# Altium PCB driver_V1.PcbDoc
Units mm, origin at the board's own origin, x right, y up, seen from the top; angles counter-clockwise.
Board outline 85.2 x 50.2 mm, 2 copper layers (Top Layer, Bottom Layer), stack 1.58 mm thick; 43 components, 21 nets, 112 pads, 20 vias.
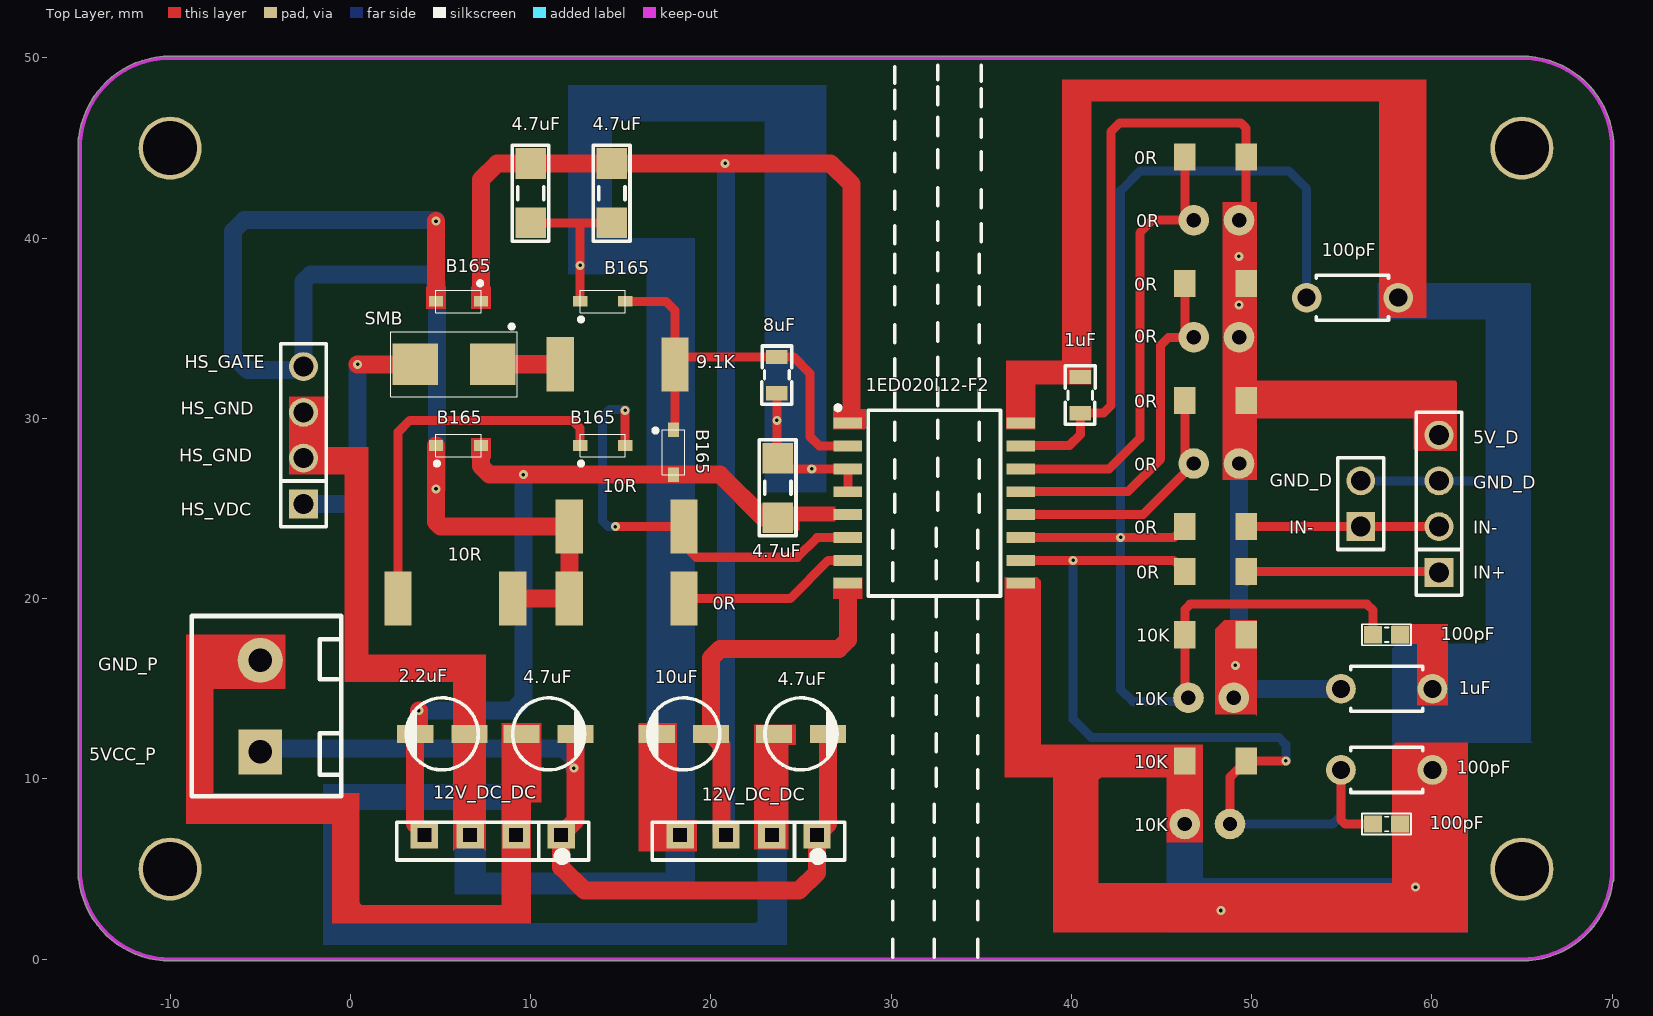
[diagram p0: Top Layer view]
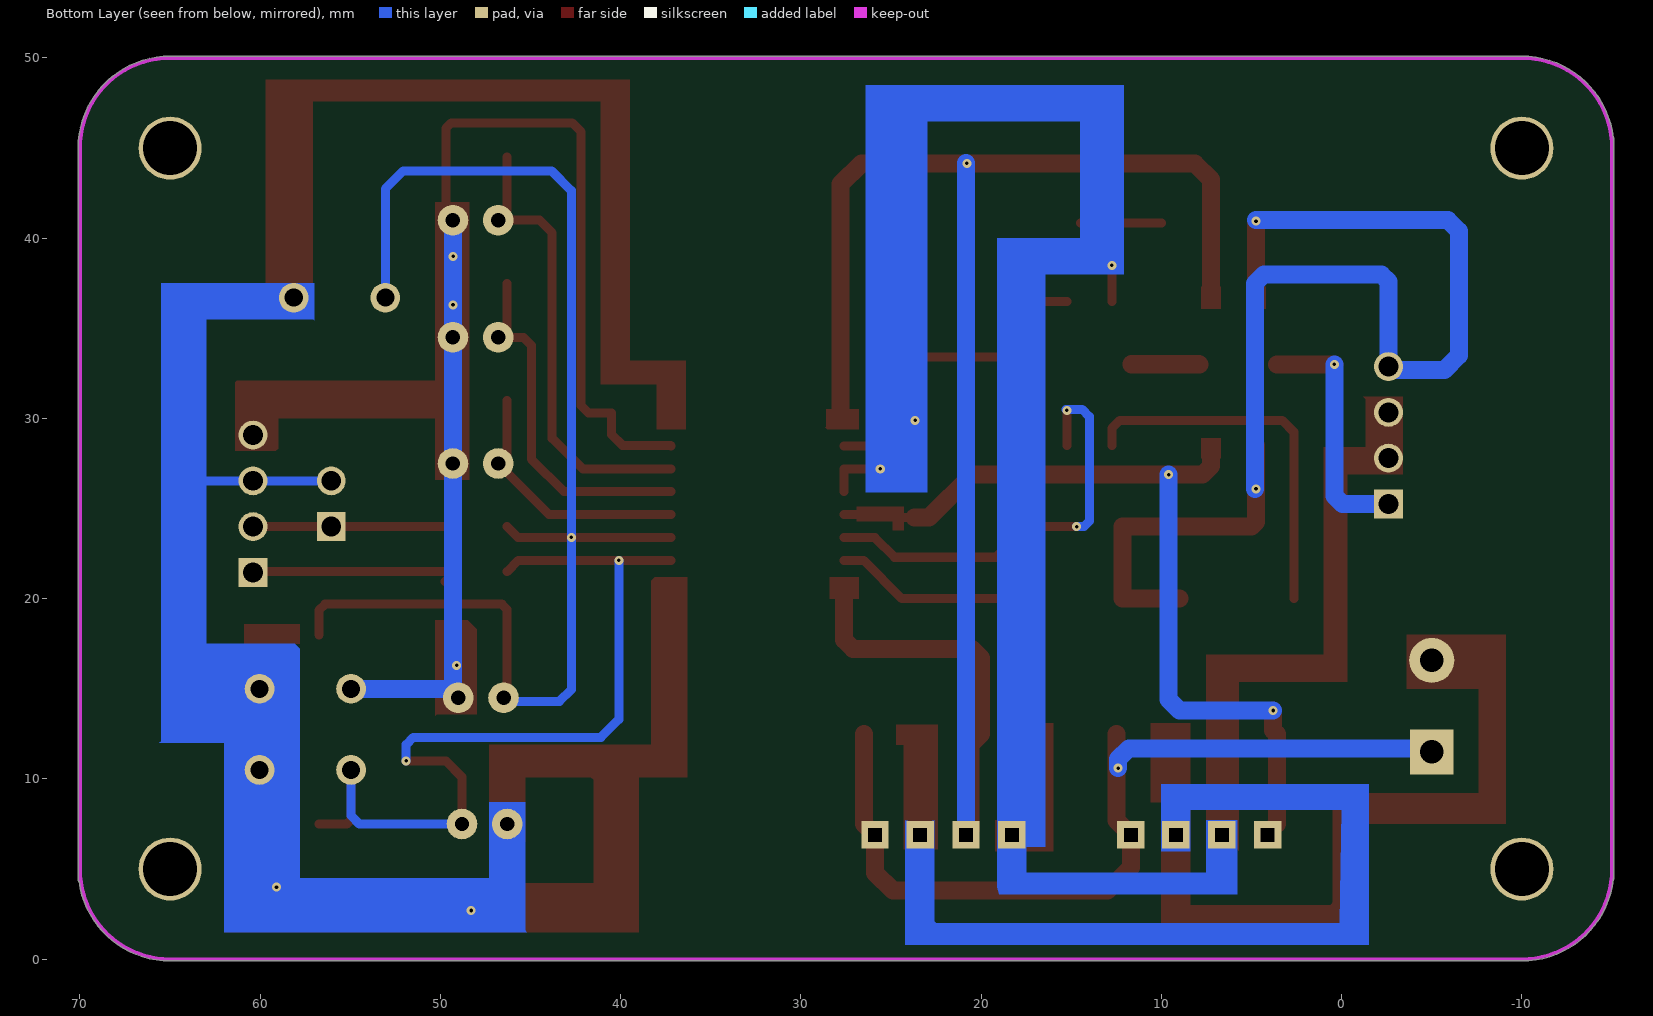
[diagram p1: Bottom Layer view, seen from below]
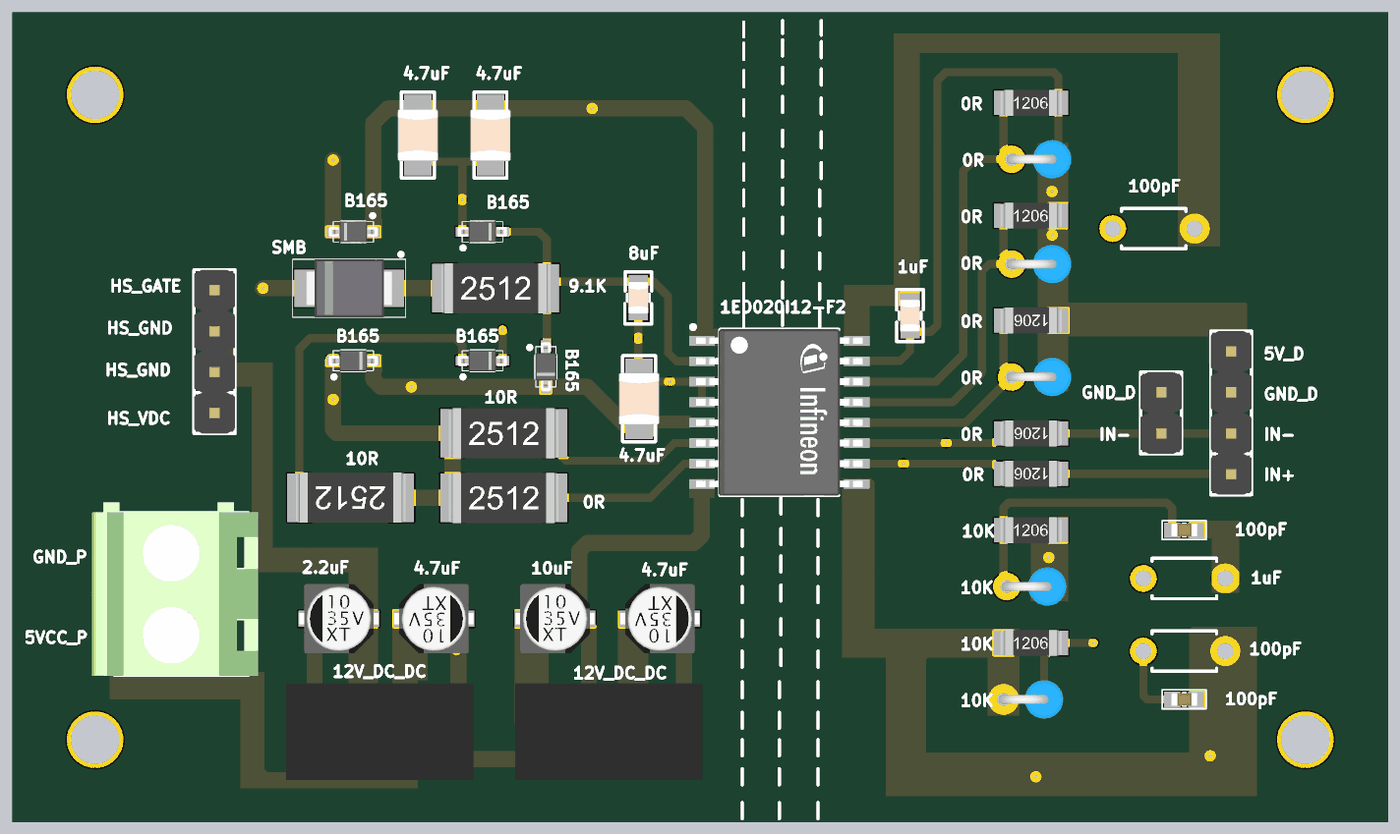
[diagram p2: 3D render of the assembled board from above, using the file's embedded part models]

## Layer stack, top to bottom
Top Solder: solder mask 0.01, Solder Resist, Dk 3.5
Top Layer: signal copper 0.035
Dielectric 1: dielectric 1.51, FR-4, Dk 4.8
Bottom Layer: signal copper 0.035
Bottom Solder: solder mask 0.01, Solder Resist, Dk 3.5

## Board outline
-15.1,44.999 cw(c-15,45) -15.1,45 cw(c-10,45) -15.1,45.005 -15.1,4.5 ccw(c-15,4.5) -15.068,4.426 ccw(c-10,5) -10,-0.1 65,-0.1 ccw(c65,5) 70.054,4.316 ccw(c70,4.4) 70.1,4.4 70.1,45 ccw(c65,45) 65,50.1 -10,50.1 ccw(c-10,45) -15.068,45.574 ccw(c-15,45.5)

## Design rules (kind name [scope] priority, off if disabled: settings)
Clearance [All] p1: gap=0.5 ignorepadtopadclearanceinfootprint=FALSE except(0: Arc-Hole Track-Hole SMDPad-Hole THPad-Hole Via-Hole Fill-Hole Poly-Hole Region-Hole Text-Hole)
PolygonConnect [All] p1: connectstyle=Relief reliefconductorwidth=0.254 reliefentries=4 polygonreliefangle="90 Angle" airgapwidth=0.254
RoutingVias [All] p1: holewidth=0.711 width=1.27 viastyle="Through Hole" minholewidth=0.711 minwidth=1.27 maxholewidth=0.711 maxwidth=1.27
SolderMaskExpansion [All] p1: expansion=0.102 istentingtop=FALSE
Width [All] p1: maxlimit=2 minlimit=0.5 preferedwidth=1
30 further rules are at their usual default settings.

## Classes and differential pairs
component class driver: 1ED020I12-F2 5V 5v C2 C6 C10 C11 C12 C13 D7 HS_GAte IN+ R4 R5 R6 R7 R8 R10 R12 R13 R14 R15 R16 R17 R19 U4

## Components (designator, comment, footprint, x,y, rotation, side; value= is the part's Value field where it differs from the comment)
0R "0R" RES1206 48,24 r180 top (schematic designator R12)
0R "0R" RES1206 48,21.5 r180 top (schematic designator R10)
0R "0R" RES1206 48,37.5 r0 top (schematic designator R8)
0R "0R" RES1206 48,31 r180 top (schematic designator R7)
0R "0R" RES1206 48,44.5 r0 top (schematic designator R6)
0R "0R" RES_Dung 48.5,34.5 r0 top (schematic designator R5)
0R "0R" RES_Dung 48.5,27.5 r0 top (schematic designator R2)
0R "0R" RES_Dung 48.5,41 r0 top (schematic designator R1)
0R "0R" RES_2512 15.315,19.8 r0 top (schematic designator R11)
1ED020I12-F2 "1ED020I12-F2" SOIC127P1028X264-16N-1 32.4,25.3 r0 top (schematic designator U3)
1uF "" CAPR5.08-4x2.5 57.5,15 r180 top (schematic designator C6)
1uF "1uF" "Tu 0805_N" 40.5,31.3 r270 top (schematic designator C5)
2.2uF "2.2uF_35V" tu_4x5.4mm 5.1,12.5 r0 top (schematic designator C2)
4.7uF "4.7uF" "tu 1206_N" 10,42.5 r270 top (schematic designator C14)
4.7uF "4.7uF" "tu 1206_N" 14.5,42.5 r270 top (schematic designator C13)
4.7uF "4.7uF" "tu 1206_N" 23.71,26.15 r270 top (schematic designator C7)
4.7uF "4.7uF_35V" tu_4x5.4mm 11,12.5 r180 top (schematic designator C4)
4.7uF "4.7uF_35V" tu_4x5.4mm 25,12.5 r180 top (schematic designator C1)
8uF "33pF" "Tu 0805_N" 23.66,32.41 r90 top (schematic designator C8)
9.1K "9.1K" RES_2512 14.815,32.8 r0 top (schematic designator R9)
10K "10K" RES_Dung 48,7.5 r0 top (schematic designator R16)
10K "10K" RES1206 48,11 r0 top (schematic designator R15)
10K "10K" RES1206 48,18 r0 top (schematic designator R4)
10K "10K" RES_Dung 48.2,14.5 r0 top (schematic designator R3)
10R "10R" RES_2512 15.315,23.8 r0 top (schematic designator R14)
10R "10R" RES_2512 5.834,20.208 r180 top (schematic designator R13)
10uF "10uF_35V" tu_4x5.4mm 18.5,12.5 r0 top (schematic designator C3)
12V_DC_DC "DC_DC_12V" B0512S/D-1W 22.04,6.6 r0 top (schematic designator U2)
12V_DC_DC "DC_DC_12V" B0512S/D-1W 7.85,6.6 r0 top (schematic designator U1)
100pF "" CAPR5.08-4x2.5 57.5,10.5 r180 top (schematic designator C11)
100pF "" CAPR5.08-4x2.5 55.6,36.7 r180 top (schematic designator C10)
100pF "100pF" "Tu 0603" 57.5,7.5 r180 top (schematic designator C12)
100pF "100pF" "Tu 0603" 57.5,18 r180 top (schematic designator C9)
B165 "BAT165" BAT165E6327HTSA1TRND 14,36.5 r90 top (schematic designator D6)
B165 "BAT165" BAT165E6327HTSA1TRND 6,36.5 r270 top (schematic designator D5)
B165 "BAT165" BAT165E6327HTSA1TRND 14,28.5 r90 top (schematic designator D4)
B165 "BAT165" BAT165E6327HTSA1TRND 6,28.5 r90 top (schematic designator D2)
B165 "BAT165" BAT165E6327HTSA1TRND 17.93,28.13 r0 top (schematic designator D1)
HS_GATE "JP 1x4 2.54" "JP 1X4 DT_N" -2.6,25.26 r90 top (schematic designator JP1)
IN+ "JP 1x4 2.54" "JP 1X4 DT_N" 60.4,21.46 r90 top (schematic designator JP2)
J1 "domino" domino_2pin_5.08mm -5,14.04 r90 top
JP3 "JP 1x2 2.54" "JP 1x2 DT_n" 56.06,24 r90 top
SMB "S3N" SMB 5.75,33 r180 top (schematic designator D3)

## Footprints (in the part's own frame and the unit in brackets; to place one, negate y for a bottom-side part, rotate by r counter-clockwise, add the part's x,y. Pads: shape width x height; smd on the part's side, far side on the other; paste and mask are expansions set on the pad)
B0512S/D-1W [mm] "B0512S/D-1W"
  rect 1.52x1.52 hole 0.75 square: 1(3.85,0.3) 2(1.35,0.3) 3(-1.2,0.3) 4(-3.74,0.3)
  silkscreen extent -5.28,-1.12 5.38,1, body extent -6,-4.1 5.6,1.91, height 18
BAT165E6327HTSA1TRND [mm] "BAT165E6327HTSA1TRND"
  rect 0.6x0.8 smd: 1(0,1.25) 2(0,-1.25)
  silkscreen extent -1.1,-1.25 0.63,1.3, body extent -0.71,-1.52 0.71,1.52, height 1.14
CAPR5.08-4x2.5 [mm] "Capacitor, Ceramic, Thru-Hole, Dipped Radial; Body 4 x 2.5 mm (WxT) Pin Spacing 5.08 mm (typ)"
  round 1.65 hole 1: 1(-2.54,0) 2(2.54,0)
  silkscreen extent -2,-1.25 2,1.25
domino_2pin_5.08mm [mm]
  rect 2.5x2.4 hole 1.3: 1(-2.54,0)
  round 2.5 hole 1.3: 2(2.54,0)
  silkscreen extent -5,-4.5 5,3.8, body extent -5.08,-5.1 5.68,5.2, height 13.59
"JP 1x2 DT_n" [mm] "2 pins, 1 row, straight, gold plating"
  rect 1.6x1.6 hole 1.1: 1(0,0)
  round 1.6 hole 1.1: 2(2.54,0)
  silkscreen extent -1.27,-1.27 3.81,1.27, body extent -1.27,-1.27 3.81,1.27, height 8.54
"JP 1X4 DT_N" [mm] "4 pins, 1 row, straight, gold plating"
  rect 1.6x1.6 hole 1.1: 1(0,0)
  round 1.6 hole 1.1: 2(2.54,0) 3(5.08,0) 4(7.62,0)
  silkscreen extent -1.27,-1.27 8.89,1.27, body extent -1.27,-1.27 8.89,1.27, height 8.54
RES1206 [mm]
  rect 1.2x1.5 smd: 1(-1.7,0) 2(1.7,0)
  body extent -1.9,-0.8 1.9,0.8, height 0.6
RES_2512 [mm]
  rect 1.5x3 smd: 1(3.185,0.2)
  rect 1.524x3 smd: 2(-3.166,0.208)
  body extent -3.4,-1.35 3.4,1.75, height 0.6
RES_Dung [mm] "Resistor, Axial; Body 10.0 x 2.8 mm (LxDia. max), Lead Dia. 0.7 mm (max)"
  round 1.7 hole 0.8: 1(-1.7,0) 2(0.807,0)
  body extent -2.01,-1.2 2.01,1.2, height 1.96
SMB [mm] "DO-214"
  rect 2.5x2.3 smd: 1(-2.15,0) 2(2.15,0)
  silkscreen extent -3.5,-2.2 3.5,1.8, body extent -2.7,-1.8 2.7,1.8
SOIC127P1028X264-16N-1 [mm] "SOIC,1.27mm,pitch;16 pin,7.52mm W X 10.34mm L X 2.64mm H body"
  rect 1.6x0.6 smd paste+0 mask+0: 1(-4.8,4.445) 2(-4.8,3.175) 3(-4.8,1.905) 4(-4.8,0.635) 5(-4.8,-0.635) 6(-4.8,-1.905) 7(-4.8,-3.175) 8(-4.8,-4.445) 9(4.8,-4.445) 10(4.8,-3.175) 11(4.8,-1.905) 12(4.8,-0.635) 13(4.8,0.635) 14(4.8,1.905) 15(4.8,3.175) 16(4.8,4.445)
  silkscreen extent -5.47,-5.15 3.68,5.42, body extent -5.16,-5.17 5.16,5.17, height 2.65
"Tu 0603" [mm] "Chip Capacitor, 2-Leads, Body 1,60x0,80mm, IPC Medium Density"
  rect 1x0.95 smd mask+0.076: 1(-0.75,0) 2(0.75,0)
  silkscreen extent -1.35,-0.58 1.37,0.58, body extent -0.8,-0.4 0.8,0.4, height 0.9
"Tu 0805_N" [mm] "Compoment SMD 80x50mil"
  rect 0.8x1.2 smd: 1(-1,-0.003) 2(1,0)
  silkscreen extent -1.62,-0.83 1.61,0.83, body extent -1,-0.62 1,0.63, height 1.26
"tu 1206_N" [mm]
  rect 1.7x1.7 smd: 1(-1.65,0) 2(1.65,0)
  silkscreen extent -2.67,-1.02 2.67,1.02, body extent -1.6,-1.25 1.6,1.25, height 2.01
tu_4x5.4mm [mm]
  rect 2x1 smd: 1(-1.5,0) 2(1.5,0)
  silkscreen extent -2,-2 2,2, body extent -2.45,-2.15 2.45,2.15, height 5.4

## Part data
0R 0R 0R 0R 0R 0R 0R 0R 0R 9.1K 10K 10K 10K 10K 10R 10R: library part 311-0.0GRTR-ND
1ED020I12-F2: "Single IGBT Driver IC"
1uF 100pF 100pF: library part Cap_gom, "Capacitor"
1uF 8uF: library part cap_0805
2.2uF 4.7uF 4.7uF 10uF: library part capacitor_electric, "capacitor_electric"
4.7uF 4.7uF 4.7uF: library part cap_1210
12V_DC_DC 12V_DC_DC: library part DC_DC_12v
100pF 100pF: library part cap_0603
HS_GATE IN+: library part "JP 1x4 2.54 Duc Thang", "C?m"
JP3: library part "JP 1x2 2.54 Duc Thang", "C?m"
SMB: library part S3A-S3N

## Free pads (board coordinates)
  round 3.5 hole 3: 2(-10,5) 2(-10,45) 2(65,5) 2(65,45)

## Via types
v1: diameter 0.5, hole 0.2, Top Layer to Bottom Layer, 20 vias

## Nets (pads, with @x,y where several pads share a name; then routed paths per layer and width w, separated by ;. In a path a pad name is that pad's centre, name@x,y a point inside that pad or via, vN(x,y) a via of type N, cw(c..) or ccw(c..) an arc to the next point about the centre after c; other vN are vias at no path point)
5V: 0R.1@49.7,31 0R.2@49.7,37.5 0R.2@49.7,44.5 0R.2@49.307,27.5 0R.2@49.307,34.5 0R.2@49.307,41 1ED020I12-F2.15 1uF.2 10K.2@49.007,14.5 10K.2@49.7,18 IN+.4 | length 90.2
  Top Layer w0.5: 1ED020I12-F2.15 37.225,28.5 39.9,28.5 40.5,29.1 40.5,30.3 41.786,30.3 42.2,30.714 42.2,45.9 42.7,46.4 49.4,46.4 49.7,46.1 49.7,44.5 49.7,41.393 0R.2@49.307,41 ; 0R.2@49.307,34.5 49.7,34.893 0R.2@49.7,37.5
  Top Layer w1: 10K.2@49.007,14.5 49.7,15.193 10K.2@49.7,18 ; 0R.2@49.307,27.5 49.7,27.893 49.7,31 59.8,31 60.4,30.4 IN+.4
  Bottom Layer w1: 10K.2@49.007,14.5 10K.2@49.307,14.8 ; 0R.2@49.307,41 v1(49.307,36.3) 49.307,34.5 49.307,27.5 10K.2@49.307,14.8 ; 1uF.2@54.96,15 49.507,15 10K.2@49.307,14.8
  other v1: 49.1,16.3 49.3,39
12V: 1ED020I12-F2.5 2.2uF.1 4.7uF.2@23.71,24.5 12V_DC_DC.4@4.11,6.9 B165.2@7.25,28.5 B165.2@17.93,26.88 | length 47.8
  Top Layer w0.5: 4.7uF.2@23.71,24.5 24.6,24.5 24.765,24.665 1ED020I12-F2.5
  Top Layer w1: v1(3.8,13.8) 3.8,12.7 2.2uF.1 3.6,7.51 12V_DC_DC.4@4.11,7 ; 7.25,27.95 7.25,27.35 7.72,26.88 v1(9.6,26.88) 17.93,26.88 20.52,26.88 22.9,24.5 4.7uF.2@23.71,24.5
  Bottom Layer w1: v1(3.8,13.8) 9,13.8 9.6,14.4 v1(9.6,26.88)
-5V: 1ED020I12-F2.1 1ED020I12-F2.8 4.7uF.1@10,44.15 4.7uF.1@14.5,44.15 10uF.2 12V_DC_DC.3@20.84,6.9 B165.1@7.25,36.5 | length 98.5
  Top Layer w1: 7.25,37.125 7.25,43.25 8.15,44.15 10,44.15 14.5,44.15 v1(20.8,44.15) 26.65,44.15 27.8,43 27.8,30.1 ; 12V_DC_DC.3@20.84,6.9 20.6,7.14 20.6,11.9 10uF.2 20,16.7 20.5,17.2 27.1,17.2 27.6,17.7 27.6,20.4
  Bottom Layer w1: 12V_DC_DC.3@20.84,6.95 v1@20.84,44.16
GND_D: 1ED020I12-F2.9 1ED020I12-F2.16 1uF.1 10K.1@46.3,7.5 10K.1@46.3,11 100pF.1 IN+.3 JP3.2 | length 155.8
  Top Layer w0.5: 1ED020I12-F2.9 37.2,12.3 38.5,11 40.3,11 ; 1ED020I12-F2.16 37.2,31.9 37.6,32.3 40.497,32.3 40.497,47.497 41.5,48.5 56.8,48.5 58.14,47.16 100pF.1@58.14,36.7 ; 10K.1@46.3,7.5 46.3,11 40.3,11 ; 100pF.1@58.25,7.5 59.035,7.5 ; 100pF.1@58.25,18 59.5,18 60.04,17.46 1uF.1@60.04,15 ; 100pF.1@60.04,10.5 60.04,7.72 59.82,7.5 59.035,7.5 ; 40.3,11 40.3,3 40.6,2.7 v1(48.3,2.7) 58.6,2.7 59.1,3.2 v1(59.1,4) 59.1,7.435 59.035,7.5
  Bottom Layer w0.5: JP3.2@56,26.6 JP3.2 IN+.3 64.16,26.54 64.2,26.5 ; 100pF.1@58.14,36.7 63.3,36.7 64.2,35.8 64.2,26.5 ; 100pF.1@60.04,10.5 60.04,15 63.3,15 64.2,15.9 64.2,26.5
GND_P: 4.7uF.2@9.5,12.5 4.7uF.2@23.5,12.5 12V_DC_DC.2 J1.2 | length 97
  Top Layer w0.5: J1.2 -7.42,16.58 -8.3,15.7 -8.3,9.6 -7,8.3 -0.7,8.3 -0.1,7.7 -0.1,3.4 0.8,2.5 9,2.5 9.5,3 12V_DC_DC.2@9.5,7.2 ; 12V_DC_DC.2@9.2,6.9 9.2,12.2 4.7uF.2@9.5,12.5 ; 12V_DC_DC.2@23.39,6.9 23.5,7.01 4.7uF.2@23.5,12.5
  Bottom Layer w1: 12V_DC_DC.2@9.2,6.9 9.2,8.2 8.2,9.2 -0.4,9.2 -1,8.6 -1,2.4 0,1.4 22.6,1.4 23.4,2.2 23.4,6.89 12V_DC_DC.2@23.39,6.9
HS_GATE: 0R.2@12.149,20.008 10R.2 B165.1@4.75,28.5 B165.2@4.75,36.5 HS_GATE.4 | length 69.5
  Top Layer w1: B165.1@4.75,28.5 v1(4.75,26.1) 4.75,24.25 4.992,24.008 12.149,24.008 12.149,20.008 9.008,20.008 10R.2@9,20 ; 4.75,37 v1(4.75,40.95)
  Bottom Layer w1: HS_GATE.4 -2.6,37.6 -2.2,38 4.3,38 4.8,37.5 v1@4.8,26.1 ; HS_GATE.4@-2.5,32.7 -5.7,32.7 -6.5,33.5 -6.5,40.4 -5.9,41 v1@4.75,41
HS_GND: 1ED020I12-F2.3 1ED020I12-F2.4 2.2uF.2 4.7uF.1@23.71,27.8 4.7uF.2@10,40.85 4.7uF.2@14.5,40.85 8uF.1 10uF.1 12V_DC_DC.3@6.65,6.9 12V_DC_DC.4@18.3,6.9 B165.1@12.75,36.5 HS_GATE.2 HS_GATE.3 | length 117.5
  Top Layer w0.5: 4.7uF.2@10,40.85 12.9,40.85 ; B165.1@12.75,36.5 v1(12.75,38.5) 12.75,40.7 12.9,40.85 ; 4.7uF.2@14.5,40.85 12.9,40.85 ; 10uF.1 17,8.2 12V_DC_DC.4@18.3,6.9 ; 8uF.1 v1(23.663,29.9) 23.663,27.847 23.71,27.8 24.305,27.205 1ED020I12-F2.3 1ED020I12-F2.4
  Bottom Layer w1: 12V_DC_DC.3@6.65,6.9 6.65,4.85 7.3,4.2 17.7,4.2 18.3,4.8 18.3,6.9 18.3,37.2 17,38.5 v1(12.75,38.5) 12.75,46.25 14.4,47.9 25,47.9 25.9,47 25.9,30.9 24.9,29.9 v1(23.663,29.9)
  other v1: 25.6,27.2
HS_HV_VDC: HS_GATE.1 SMB.2 | length 13.7
  Top Layer w1: v1(0.4,33) SMB.2
  Bottom Layer w1: HS_GATE.1 -0.04,25.26 0.4,25.7 v1(0.4,33)
NetC8_2: 1ED020I12-F2.2 8uF.2 9.1K.1 B165.1@17.93,29.38 B165.2@15.25,36.5 | length 23.5
  Top Layer w0.5: B165.2@15.25,36.5 17.5,36.5 18,36 9.1K.1 ; B165.1@17.93,29.38 18,29.45 9.1K.1 ; 1ED020I12-F2.2 26.025,28.475 25.5,29 25.5,32.5 24.59,33.41 8uF.2 18.41,33.41 9.1K.1
NetC9_2: 0R.2@46.3,24 1ED020I12-F2.11 10K.1@46.3,18 10K.1@46.5,14.5 100pF.2@53.06,36.7 100pF.2@56.75,18 | length 75.4
  Top Layer w0.5: 1ED020I12-F2.11 45.695,23.395 0R.2@46.3,24 ; 10K.1@46.5,14.5 46.3,14.7 46.3,18 46.3,19.4 46.6,19.7 56.4,19.7 56.75,19.35 100pF.2@56.75,18
  Bottom Layer w0.5: 10K.1@46.5,14.5 46.3,14.3 43.4,14.3 42.74,14.96 v1(42.74,23.4) 42.74,42.64 43.84,43.74 52.06,43.74 53.06,42.74 100pF.2@53.06,36.7
NetC11_2: 0R.2@46.3,21.5 1ED020I12-F2.10 10K.2@48.807,7.5 10K.2@49.7,11 100pF.2@54.96,10.5 100pF.2@56.75,7.5 | length 51.1
  Top Layer w0.5: 1ED020I12-F2.10 v1(40.1,22.125) 45.675,22.125 0R.2@46.3,21.5 ; 10K.2@48.807,7.5 48.807,10.107 49.7,11 v1(51.9,11) ; 100pF.2@54.96,10.5 54.96,7.74 55.2,7.5 100pF.2@56.75,7.5
  Bottom Layer w0.5: v1(40.1,22.125) 40.1,13.3 41.1,12.3 51.5,12.3 51.9,11.9 v1(51.9,11) ; 10K.2@48.807,7.5 54.5,7.5 54.96,7.96 100pF.2@54.96,10.5
NetD3_1: 9.1K.2 SMB.1 | length 3.8
  Top Layer w1: SMB.1 7.908,33.008 9.1K.2
NetD4_1: 10R.1@2.649,20.008 B165.1@12.75,28.5 | length 20.7
  Top Layer w0.5: 10R.1@2.649,20.008 2.649,29.249 3.3,29.9 12.3,29.9 12.75,29.45 B165.1@12.75,28.5
NetD4_2: 1ED020I12-F2.6 10R.1@18.5,24 B165.2@15.25,28.5 | length 24.7
  Top Layer w0.5: v1(14.7,24) 18.5,24 18.5,23 19.2,22.3 24.8,22.3 25.895,23.395 1ED020I12-F2.6 ; B165.2@15.25,28.5 v1(15.25,30.45)
  Bottom Layer w0.5: v1(14.7,24) 14.3,24 14,24.3 14,30.1 14.4,30.5 v1@15.3,30.5
NetJP2_1: 0R.1@49.7,21.5 IN+.1 | length 10.8
  Top Layer w0.5: 0R.1@49.7,21 0R.1@49.74,20.96 ; 0R.1@49.7,21.5 60.36,21.5 IN+.1
NetJP2_2: 0R.1@49.7,24 IN+.2 JP3.1 | length 10.9
  Top Layer w0.5: 0R.1@49.7,24 55.5,24 JP3.1@56,23.5 ; JP3.1 IN+.2
  Bottom Layer w0.5: IN+.2@60.34,24.06 IN+.2
NetR1_1: 0R.1@46.3,44.5 0R.1@46.8,41 1ED020I12-F2.14 | length 25.7
  Top Layer w0.5: 1ED020I12-F2.14 42.105,27.205 43.8,28.9 43.8,40.3 44.5,41 46.8,41 46.3,41.5 0R.1@46.3,44.5
NetR2_1: 0R.1@46.8,27.5 0R.2@46.3,31 1ED020I12-F2.12 | length 14.5
  Top Layer w0.5: 1ED020I12-F2.12 43.965,24.665 46.8,27.5 46.3,28 0R.2@46.3,31
NetR5_1: 0R.1@46.3,37.5 0R.1@46.8,34.5 1ED020I12-F2.13 | length 20
  Top Layer w0.5: 1ED020I12-F2.13 43.135,25.935 44.95,27.75 44.95,34.05 45.4,34.5 46.8,34.5 46.3,35 0R.1@46.3,37.5
NetR11_1: 0R.1@18.5,20 1ED020I12-F2.7 | length 10
  Top Layer w0.5: 0R.1@18.5,20 24.4,20 26.525,22.125 1ED020I12-F2.7
VCC_5V: 4.7uF.1@12.5,12.5 4.7uF.1@26.5,12.5 12V_DC_DC.1 J1.1 | length 49.1
  Top Layer w1: 4.7uF.1@12.5,12.5 12.5,7.7 11.7,6.9 11.7,5.1 13,3.8 24.9,3.8 25.89,4.79 25.89,6.9 26.5,7.51 4.7uF.1@26.5,12.5
  Bottom Layer w1: J1.1 -4.8,11.7 11.8,11.7 12.4,11.1 v1(12.4,10.6)

## Keep-outs
Keep-Out Layer:
  lines w0.2: -15,4.5 -15,45.5 ; -15,5 ccw(c-10,5) -10,0 58.3,0 65,0 ccw(c65,5) 70,5 ; -15,45 cw(c-10,45) -10,50 65,50 cw(c65,45) 70,45 70,4.4

## Other copper
Top Layer:
  region net 5V: 59,30 59,28.33 59.13,28.2 61.4,28.2 61.4,32 61.3,32.1 50.3,32.1 50.3,30
  region net 12V: 26.9,25 26.9,25.1 26.8,25.1 24.3,25.1 24.3,23.8 24.9,23.8 24.9,24.1 24.9,24.3 25.1,24.3 26.9,24.3
  region net 12V: 7.8,28.9 7.8,27.8 6.7,27.8 6.7,28.9
  region net GND_P: 8.4,13.1 10.6,13.1 10.6,8.7 10,8.7 10,7.7 10,6.1 8.4,6.1
  region net GND_P: 22.4,13 22.4,6.1 24.3,6.1 24.3,11.9 24.7,11.9 24.7,13
  region net HS_GND: 16,13.1 18.1,13.1 18.1,7.718 19.212,7.718 19.212,6 16.4,6 16,6
  region net -5V: 26.8,21.2 28.4,21.2 28.4,20 26.8,20
  region net -5V: 6.7,36.1 7.8,36.1 7.8,37.3 6.7,37.3
  region net HS_GATE: 4.2,36.1 5.3,36.1 5.3,37.3 4.2,37.3
  region net -5V: 26.8,30.5 28.6,30.5 28.6,29.54 28.64,29.5 28.54,29.4 26.8,29.4
  region net HS_GND: -1.2,31.2 -1.33,31.07 -1.33,28.4 1,28.4 1,16.9 7.525,16.9 7.525,6.025 6.659,6.891 5.7,6.025 5.7,15.4 -0.3,15.4 -0.3,26.9 -3.4,26.9 -3.4,31.2
  region net GND_P: -3.6,15 -3.6,18 -9.1,18 -9.1,10.6 -9.1,7.6 -9.1,7.5 -1,7.5 -1,2 0.5,2 2,2 10,2 10,7.6 10,7.7 8.4,7.7 8.4,3 8,3 0.5,3 0.5,9.2 -7.6,9.2 -7.6,15
  region net GND_D: 57.8,18.584 57.8,17.5 59.2,17.5 59.2,14.206 59.2,14.1 60.04,14.1 60.9,14.1 60.9,18.584
  region net GND_D: 36.4,29.4 38,29.4 38,31.9 41.1,31.9 41.1,33.2 41.1,47.6 57.1,47.6 57.1,35.6 59.7,35.6 59.7,48.8 39.5,48.8 39.5,33.2 36.4,33.2 36.4,32
  region net 5V: 50.3,18.8 48.5,18.8 48,18.3 48,13.6 50.2,13.6 50.3,13.5
  region net 5V: 50.2,42 50.3,42 50.3,41.9 50.3,26.6 48.4,26.6 48.4,26.7 48.4,42
  region net GND_D: 62,12 58,12 57.8,11.8 57.8,4.2 62,4.2
  region net GND_D: 57.8,8.084 58.8,8.084 58.8,4.2 57.8,4.2
  region net GND_D: 45.3,10.1 47.3,10.1 47.3,6.5 45.3,6.5
  region net GND_D: 39,10.1 39,1.5 62,1.5 62,5.4 60.8,4.2 41.5,4.2 41.5,9.95 41.65,10.1
  region net GND_D: 36.3,21.2 38.1,21.2 38.3,21 38.3,11.9 47,11.9 47.3,11.9 47.3,10.5 47.3,10.1 36.3,10.1 36.3,10.5 36.3,10.6 36.3,10.7
Bottom Layer:
  region net HS_GND: 17.5,6.25 16.45,6.25 16.45,38 12.1,38 12.1,48.5 26.4,48.5 26.4,25.9 22.999,25.9 22.999,46.5 14.5,46.5 14.5,40 19.1,40 19.1,6.2
  region net HS_GND: 7.5,7.7 7.5,6.1 7.5,4.8 12.5,4.8 17.5,4.8 17.5,7.7 19.1,7.7 19.1,5.8 19.1,4 19,3.6 12.3,3.6 5.8,3.6 5.8,6.1 5.8,7.7
  region net GND_P: 8.4,6 10,6 10,9.7 -1.5,9.7 -1.5,0.8 23.957,0.8 24,0.8 24.2,0.8 24.2,7.7 23.3,7.5 22.6,7.7 22.6,2 22.3,2 0.1,2 0,8.3 0.1,8.3 2.1,8.3 8.4,8.3
  region net GND_D: 57,37.5 65.5,37.5 65.5,17.5 63,17.5 63,35.5 57.05,35.5 57,35.45
  region net GND_D: 57.8,12 57.8,17.216 58.084,17.5 65.5,17.5 65.5,12.1 65.6,12
  region net GND_D: 45.3,1.6 45.2,1.5 62,1.5 62,12 57.8,12 57.8,11.7 57.8,4.5 47.3,4.5 47.3,4.6 47.3,4.7 47.3,8.7 45.3,8.7

## Silkscreen, mask and mechanical layers (free items; w line width, h text height)
Top Overlay:
  lines w0.2: 30.1,0.1 30.1,1.1 ; 30.1,2.2 30.1,3.2 ; 30.1,4 30.1,5 ; 30.1,5.7 30.1,6.7 ; 30.1,7.6 30.1,8.6 ; 30.1,9.5 30.1,10.5 ; 30.1,11.4 30.1,12.4 ; 30.1,13.5 30.1,14.5 ; 30.1,15.3 30.1,16.3 ; 30.1,17 30.1,18 ; 30.1,18.9 30.1,19.9 ; 30.1,21 30.1,22 ; 30.1,22.8 30.1,23.8 ; 30.2,24.8 30.2,25.8 ; 30.2,26.7 30.2,27.7 ; 30.2,28.8 30.2,29.8 ; 30.2,30.6 30.2,31.6 ; 30.2,32.3 30.2,33.3 ; 30.2,34.2 30.2,35.2 ; 30.2,36.3 30.2,37.3 ; 30.2,38.1 30.2,39.1 ; 30.2,39.7 30.2,40.7 ; 30.2,41.6 30.2,42.6 ; 30.2,43.7 30.2,44.7 ; 30.2,45.5 30.2,46.5 ; 30.2,47.2 30.2,48.2 ; 30.2,48.6 30.2,49.5 ; 32.4,0.1 32.4,1.1 ; 32.4,2.2 32.4,3.2 ; 32.4,4 32.4,5 ; 32.4,5.7 32.4,6.7 ; 32.4,7.6 32.4,8.6 ; 32.5,9.6 32.5,10.6 ; 32.5,11.5 32.5,12.5 ; 32.5,13.6 32.5,14.6 ; 32.5,15.4 32.5,16.4 ; 32.5,17.1 32.5,18.1 ; 32.5,19 32.5,20 ; 32.5,21.1 32.5,22.1 ; 32.5,22.9 32.5,23.9 ; 32.6,24.9 32.6,25.9 ; 32.6,26.8 32.6,27.8 ; 32.6,28.9 32.6,29.9 ; 32.6,30.7 32.6,31.7 ; 32.6,32.4 32.6,33.4 ; 32.6,34.3 32.6,35.3 ; 32.6,36.4 32.6,37.4 ; 32.6,38.2 32.6,39.2 ; 32.6,39.9 32.6,40.9 ; 32.6,41.8 32.6,42.8 ; 32.6,43.9 32.6,44.9 ; 32.6,45.7 32.6,46.7 ; 32.6,47.4 32.6,48.4 ; 32.6,48.8 32.6,49.6 ; 34.8,0.1 34.8,1.1 ; 34.8,2.2 34.8,3.2 ; 34.8,4 34.8,5 ; 34.8,5.7 34.8,6.7 ; 34.8,7.6 34.8,8.6 ; 34.8,9.5 34.8,10.5 ; 34.8,11.4 34.8,12.4 ; 34.8,13.5 34.8,14.5 ; 34.8,15.3 34.8,16.3 ; 34.8,17 34.8,18 ; 34.8,18.9 34.8,19.9 ; 34.8,21 34.8,22 ; 34.8,22.8 34.8,23.8 ; 34.9,24.8 34.9,25.8 ; 34.9,26.7 34.9,27.7 ; 34.9,28.8 34.9,29.8 ; 34.9,30.6 34.9,31.6 ; 34.9,32.3 34.9,33.3 ; 34.9,34.2 34.9,35.2 ; 34.9,36.3 34.9,37.3 ; 34.9,38.1 34.9,39.1 ; 35,39.8 35,40.8 ; 35,41.7 35,42.7 ; 35,43.8 35,44.8 ; 35,45.6 35,46.6 ; 35,47.3 35,48.3 ; 35,48.7 35,49.6
  text "HS_GND" at -9.4,30.2 h0.7
  text "5V_D" at 62.3,28.6 h0.7
  text "HS_GND" at -9.5,27.6 h0.7
  text "GND_D" at 51,26.2 h0.7
  text "GND_D" at 62.3,26.1 h0.7
  text "HS_VDC" at -9.4,24.6 h0.7
  text "IN-" at 52.1,23.6 h0.7
  text "IN-" at 62.3,23.6 h0.7
  text "GND_P" at -14,16 h0.7
  text "5VCC_P" at -14.5,11 h0.7